# Allegro board LT6711GXE_U2_HDMI_to_DP_Draft2.brd
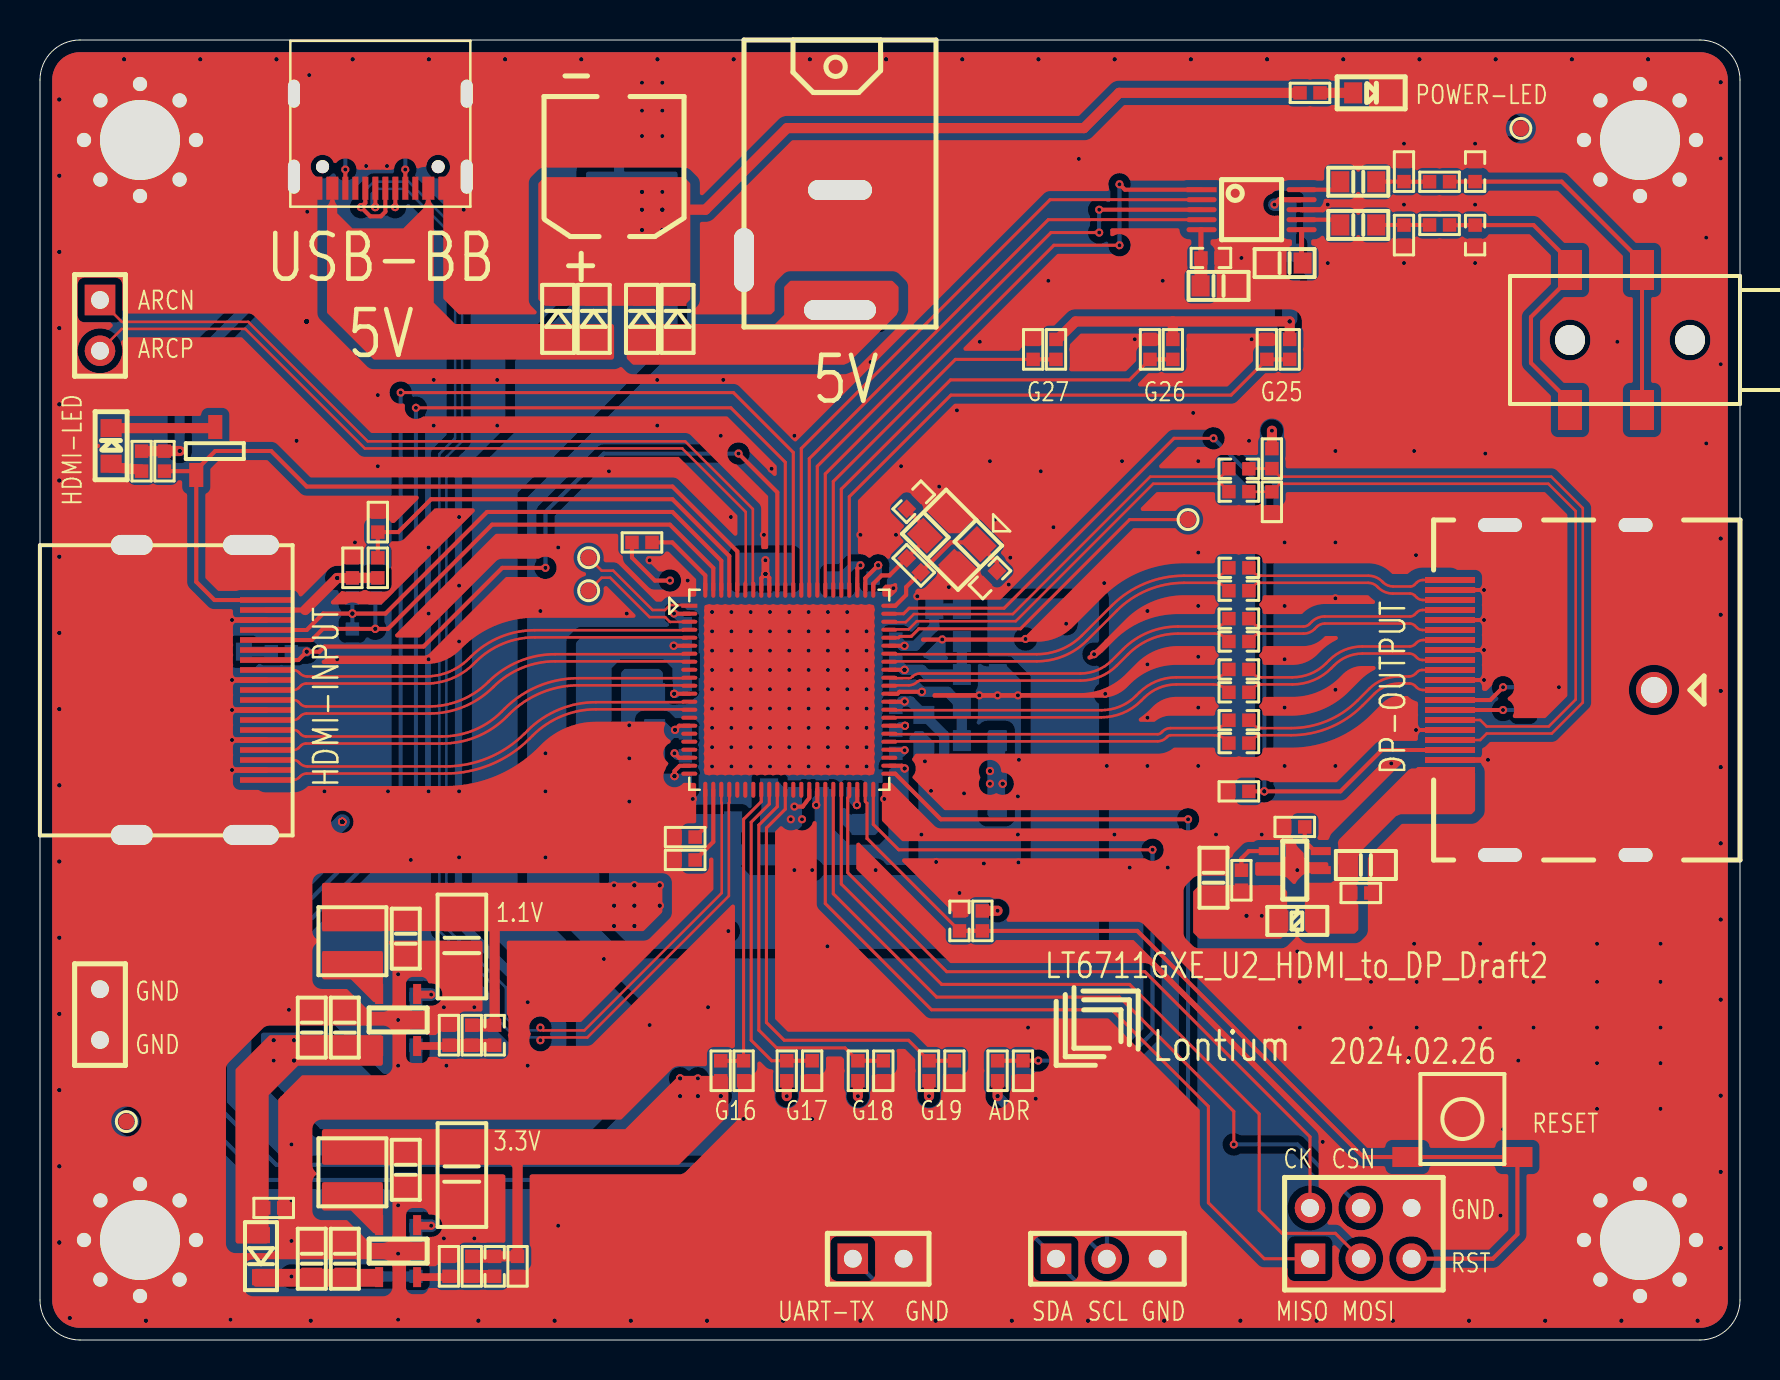
[diagram p0: board, top side]
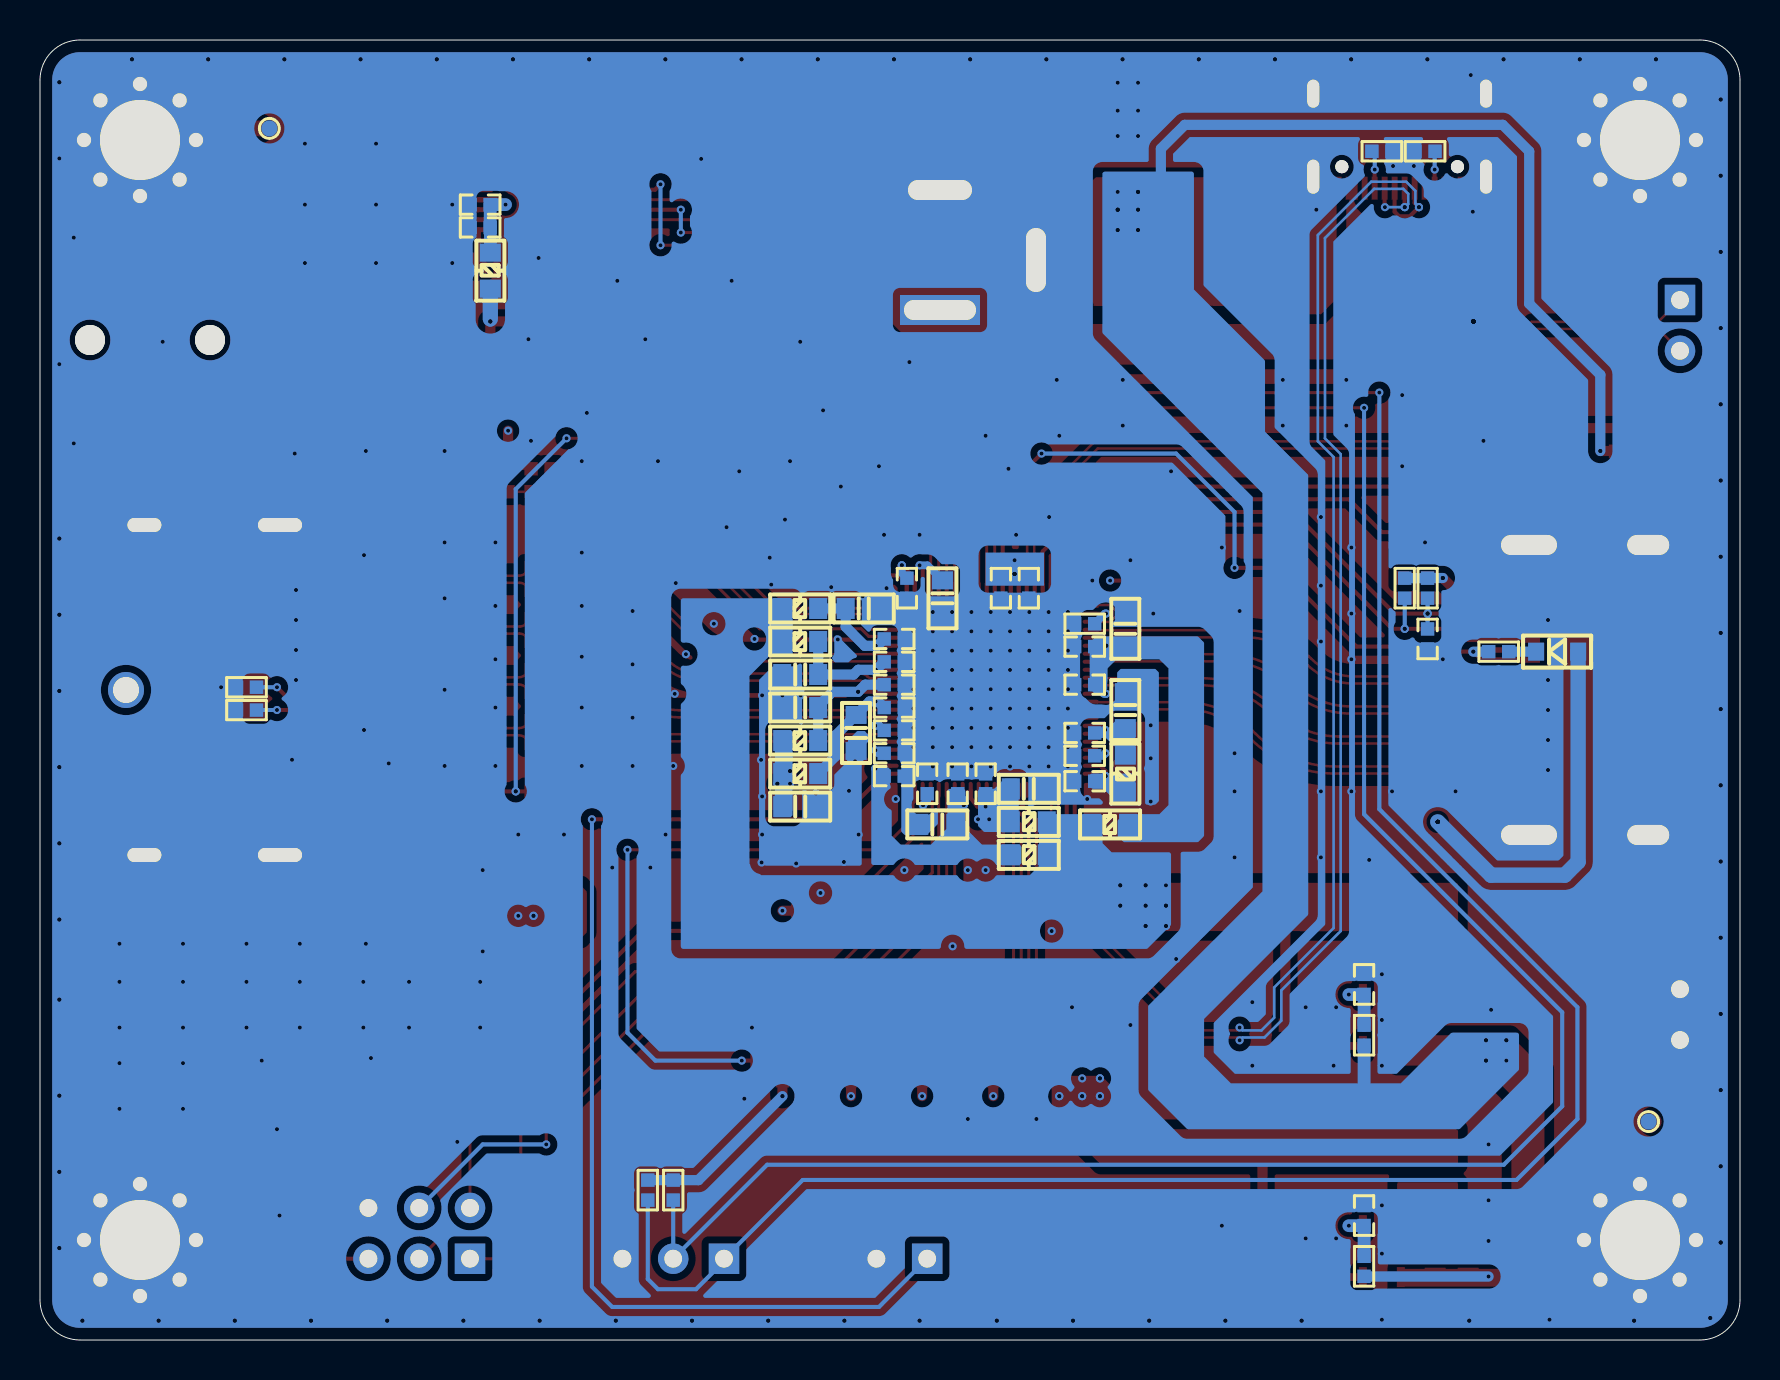
[diagram p1: board, bottom side, seen from below]

Outline 85 x 65 mm; copper layers: TOP, GND, POWER, BOTTOM. Coordinates in mm from the lower left corner of the outline.
Outline path: 0,63 0,2 arc(0.59,0.59) 2,0 83,0 arc(84.41,0.59) 85,2 85,63 arc(84.41,64.41) 83,65 2,65 arc(0.59,64.41) 0,63

## Design rules (mm)
constraint set DEFAULT: min track width 0.127
net group D1: nets HS_TSTN HS_TSTP
net group D2: nets ARCN ARCP
net group D3: nets TMDS_D0+ TMDS_D0-
net group D4: nets TMDS_D2+ TMDS_D2-
net group D5: nets TMDS_D1+ TMDS_D1-
net group D6: nets TMDS_CLK+ TMDS_CLK-
net group D7: nets N12122994 N12123010
net group D8: nets N12122980 N12122984
net group D9: nets N12122960 N12122976
net group D10: nets N12122880 N12122956
net group D11: nets DP_D3+ DP_D3-
net group D12: nets DP_D2+ DP_D2-
net group D13: nets DP_D1+ DP_D1-
net group D14: nets DP_D0+ DP_D0-
net group D15: nets DP_AUX+ DP_AUX-
net group D16: nets TX_AUXN TX_AUXP
net group D17: nets BB_DM BB_DP

## Placement (name value [footprint] x y rotation side)
C1  .10  [0603-C]  39.88 37.08 270 bottom
C2  .10  [0402-C]  59.94 38.61 0 top
C3  .10  [0402-C]  59.94 37.47 0 top
C4  .10  [0402-C]  59.94 36.07 0 top
C5  .10  [0402-C]  59.94 34.92 0 top
C6  .10  [0402-C]  59.94 33.53 0 top
C7  .10  [0402-C]  59.94 32.38 0 top
C8  .10  [0402-C]  59.94 30.99 0 top
C9  .10  [0402-C]  59.94 29.84 0 top
C10  .10  [0402-C]  59.94 42.42 0 top
C11  .10  [0402-C]  59.94 43.56 0 top
C12  .10  [0603-C]  30.73 35.56 90 bottom
C13  .10  [0402-C]  32.77 34.67 180 bottom
C14  .10  [0402-C]  32.77 32.77 180 bottom
C15  .10  [0603-C]  46.99 26.67 180 bottom
C16  .10  [0603-C]  43.81 36.58 180 bottom
C17  .10  [0402-C]  42.29 35.05 0 bottom
C18  .10  [0603-C]  46.99 33.27 0 bottom
C19  .10  [0402-C]  42.29 30.48 0 bottom
C20  .10  [0402-C]  47.5 38.1 225 top
C21  .10  [0402-C]  39.12 27.81 270 bottom
C22  .10  [0402-C]  42.29 28.19 0 bottom
C23  .10  [0402-C]  42.29 31.62 0 bottom
C24  .10  [0402-C]  42.29 29.34 0 bottom
C25  .10  [0603-C]  40.13 25.78 0 bottom
C26  .10  [0603-C]  35.56 27.56 180 bottom
C27  .10  [0402-C]  32.77 29.21 180 bottom
C28  .10  [0402-C]  37.72 27.81 270 bottom
C29  .10  [0402-C]  36.96 37.59 90 bottom
C30  .10  [0402-C]  35.56 37.59 90 bottom
C31  .10  [0402-C]  43.69 41.91 45 top
C32  .10  [0402-C]  22.73 15.24 90 top
C33  .10  [0603-C]  15.24 15.62 270 top
C34  .10  [0402-C]  18.8 17.78 90 bottom
C35  .10  [0603-C]  18.29 20.07 270 top
C36  .10  [1206-C]  21.08 19.68 270 top
C37  .10  [0402-C]  45.97 20.95 90 top
C38  .10  [0402-C]  42.29 33.91 0 bottom
C39  .10  [0402-C]  42.29 32.77 0 bottom
C40  .10  [0603-C]  46.99 31.62 0 bottom
C41  .10  [0402-C]  15.62 35.05 90 bottom
C42  .10  [1206-C]  21.08 8.26 270 top
C43  .10  [0402-C]  62.99 55.63 0 bottom
C44  .10  [0402-C]  62.99 56.77 0 bottom
C45  .10  [0402-C]  71.75 58.42 270 top
C46  .10  [0603-C]  65.91 57.91 0 top
C47  .10  [0603-C]  65.91 55.75 0 top
C48  .10  [0402-C]  18.8 6.22 90 bottom
C49  .10  [0603-C]  18.29 8.51 270 top
C50  .10  [0603-C]  58.93 52.7 0 top
C51  .10  [0402-C]  58.55 54.1 0 top
C52  .10  [0603-C]  62.23 53.85 180 top
C53  .10  [0402-C]  71.75 55.24 90 top
C54  .10  [0402-C]  22.73 3.68 90 top
C55  .10  [0603-C]  13.59 4.06 270 top
C56  .10  [0603-C]  30.73 31.5 90 bottom
C57  .10  [0402-C]  32.77 30.35 180 bottom
C58  .10  [0603-C]  44.2 30.35 270 bottom
C59  .10  [0402-C]  41.66 37.59 90 bottom
C60  .10  [0402-C]  32.77 27.94 180 bottom
C61  .10  [0402-C]  40.64 27.81 270 bottom
C62  .10  [0603-C]  13.59 15.62 270 top
C63  .10  [0603-C]  15.24 4.06 270 top
C64  .10  [0603-C]  58.67 23.11 90 top
C65  .10  [0603-C]  66.29 23.75 0 top
CE1  .10  [ECAP6_3_5_4MM]  28.7 58.67 180 top
CN1  -  [HDMI_TYPEA_FEMAL_SMD]  11.3 32.5 270 top
CN2  -  [DP_SMD_FEMALE]  80.7 32.5 90 top
D1  .10  [SOD-323]  9.14 34.42 0 bottom
D2  .10  [SOD-323]  11.05 4.19 270 top
D3  .10  [SOD-323]  31.88 51.05 90 top
D4  .10  [SOD-323]  30.1 51.05 90 top
D5  .10  [SOD-323]  25.91 51.05 90 top
D6  .10  [SOD-323]  27.69 51.05 90 top
FB1  .10  [0603-FB]  62.87 20.95 0 top
FB2  .10  [0603-FB]  31.5 25.78 180 bottom
FB3  .10  [0603-FB]  46.99 36.58 180 bottom
FB4  .10  [0603-FB]  46.99 34.92 180 bottom
FB5  .10  [0603-FB]  35.56 24.26 0 bottom
FB6  .10  [0603-FB]  35.56 25.91 0 bottom
FB7  .10  [0603-FB]  46.99 29.97 180 bottom
FB8  .10  [0603-FB]  30.73 28.32 90 bottom
FB9  .10  [0603-FB]  62.48 53.47 270 bottom
FB10  .10  [0603-FB]  46.99 28.32 180 bottom
H1  -  [HOLE4-7]  80 60 0 top
H2  -  [HOLE4-7]  5 5 0 top
H3  -  [HOLE4-7]  5 60 0 top
H4  -  [HOLE4-7]  80 5 0 top
J1  -  [DC005]  40 57.5 270 top
J2  -  [PHONEJACK_STEREO]  85 50 180 top
J3  -  [CON3X1X254MM]  50.8 4.06 0 top
J4  -  [KH_TYPEC_16_P]  17.02 58.17 180 top
J5  .10  [CON2X1X254MM]  40.64 4.06 0 top
J6  -  [CON3X2X254MM]  63.5 4.06 0 top
J7  .10  [CON2X1X254MM]  3 15 90 top
J8  .10  [CON2X1X254MM]  3 52 270 top
K1  -  [BUTTON_SMD]  71.12 11.05 90 top
L1  .10  [CD3015]  15.62 19.94 90 top
L2  .10  [CD3015]  15.62 8.38 90 top
LED1  .10  [0603-LED]  3.56 44.7 90 top
LED2  .10  [0603-LED]  66.55 62.36 0 top
MARK1  -  [TP1]  4.32 10.92 0 top
MARK2  -  [TP1]  74.04 60.58 0 top
MARK3  -  [TP1]  4.57 10.92 180 bottom
MARK4  -  [TP1]  73.53 60.58 180 bottom
P1  -  [TP1]  57.4 41.02 0 top
P2  -  [TP1]  27.43 39.12 0 top
P3  -  [TP1]  27.43 37.47 0 top
Q1  -  [SOT23-3]  8.76 44.45 90 top
R1  .10  [0402-R]  12.06 34.42 0 bottom
R2  .10  [0402-R]  32.77 35.81 0 bottom
R3  .10  [0402-R]  16.76 37.59 270 bottom
R4  .10  [0402-R]  15.62 37.59 270 bottom
R5  .10  [0402-R]  43.69 38.73 315 top
R6  .10  [0402-R]  5.08 43.94 90 top
R7  .10  [0402-R]  15.75 59.44 0 bottom
R8  .10  [0402-R]  15.62 38.61 90 top
R9  .10  [0402-R]  16.89 38.61 90 top
R10  .10  [0402-R]  59.94 27.43 180 top
R11  .10  [0402-R]  16.89 40.89 90 top
R12  .10  [0402-R]  44.45 13.46 90 top
R13  .10  [0402-R]  60.07 22.99 90 top
R14  .10  [0402-R]  61.59 44.07 270 top
R15  .10  [0402-R]  32.26 24 180 top
R16  .10  [0402-R]  32.26 25.15 180 top
R17  .10  [0402-R]  61.59 41.91 270 top
R18  .10  [0402-R]  63.5 62.36 180 top
R19  .10  [0402-R]  45.72 13.46 270 top
R20  .10  [0402-R]  74.68 32.64 0 bottom
R21  .10  [0402-R]  34.04 13.46 90 top
R22  .10  [0402-R]  37.34 13.46 90 top
R23  .10  [0402-R]  40.89 13.46 90 top
R24  .10  [0402-R]  18.8 15.24 90 bottom
R25  .10  [0402-R]  21.59 15.24 90 top
R26  .10  [0402-R]  20.45 15.24 270 top
R27  .10  [0402-R]  74.68 31.5 0 bottom
R28  .10  [0402-R]  38.61 13.46 270 top
R29  .10  [0402-R]  42.16 13.46 270 top
R30  .10  [0402-R]  47.12 20.95 270 top
R31  .10  [0402-R]  6.22 43.94 270 top
R32  .10  [0402-R]  35.18 13.46 270 top
R33  .10  [0402-R]  30.1 39.88 0 top
R34  .10  [0402-R]  54.61 7.49 270 bottom
R35  .10  [0402-R]  53.34 7.49 270 bottom
R36  .10  [0402-R]  69.98 57.91 0 top
R37  .10  [0402-R]  18.8 3.68 90 bottom
R38  .10  [0402-R]  20.45 3.68 270 top
R39  .10  [0402-R]  68.2 58.42 90 top
R40  .10  [0402-R]  21.59 3.68 90 top
R41  .10  [0402-R]  49.66 49.53 90 top
R42  .10  [0402-R]  50.8 49.53 270 top
R43  .10  [0402-R]  55.5 49.53 90 top
R44  .10  [0402-R]  56.64 49.53 270 top
R45  .10  [0402-R]  61.34 49.53 90 top
R46  .10  [0402-R]  62.48 49.53 270 top
R47  .10  [0402-R]  69.98 55.75 0 top
R48  .10  [0402-R]  68.2 55.24 270 top
R49  .10  [0402-R]  23.88 3.68 90 top
R50  .10  [0402-R]  47.88 13.46 90 top
R51  .10  [0402-R]  49.15 13.46 270 top
R52  .10  [0402-R]  11.68 6.6 180 top
R53  .10  [0402-R]  62.74 25.65 0 top
R54  .10  [0402-R]  66.04 22.35 0 top
R55  .10  [0402-R]  17.91 59.44 180 bottom
U1  -  [QFN88-LT6711GXE]  37.47 32.51 0 top
U2  -  [SOT23-5]  17.91 16 180 top
U3  -  [SOT23-5]  17.91 4.45 180 top
U4  -  [SOT23-5]  62.74 23.5 90 top
U5  -  [TSSOP-10-3MM]  60.58 56.52 270 top
Y1  -  [CRY_3225]  45.59 40.01 315 top

## Library data of the parts
C1 C12 C15 C16 C18 C25 C26 C33 C35 C40 C46 C47 C49 C50 C52 C55 C56 C58 C62-C65 = 0603-C
C2-C11 C13 C14 C17 C19-C24 C27-C32 C34 C37-C39 C41 C43-C45 C48 C51 C53 C54 C57 C59-C61 = 0402-C
C36 C42 = 1206-C
CE1 = ECAP6_3_5_4MM
CN1 = HDMI_TYPEA_FEMAL_SMD
CN2 = DP_SMD_FEMALE
D1-D6 = SOD-323
FB1-FB10 = 0603-FB
H1-H4 = HOLE4-7
J1 = DC005
J2 = PHONEJACK_STEREO
J3 = CON3X1X254MM
J4 = KH_TYPEC_16_P
J5 J7 J8 = CON2X1X254MM
J6 = CON3X2X254MM
K1 = BUTTON_SMD
L1 L2 = CD3015
LED1 LED2 = 0603-LED
MARK1-MARK4 P1-P3 = TP1
Q1 = SOT23-3
R1-R55 = 0402-R
U1 = QFN88-LT6711GXE
U2-U4 = SOT23-5
U5 = TSSOP-10-3MM
Y1 = CRY_3225

## Footprints (pads in the part's own frame, mm; a bottom-side part is the same pattern mirrored in y, then rotated)
0402-C
  rect 0.67x0.67 smd: 1(-0.5,0) 2(0.5,0)
0402-R
  rect 0.67x0.67 smd: 1(-0.5,0) 2(0.5,0)
0603-C
  rect 0.9x1.05 smd: 1(-0.9,0) 2(0.9,0)
0603-FB
  rect 0.9x1.05 smd: 1(-0.9,0) 2(0.9,0)
0603-LED
  rect 0.9x1.05 smd: A(-0.889,0) C(0.889,0)
1206-C
  rect 1.5x1.8 smd: 1(-1.5,0) 2(1.5,0)
BUTTON_SMD
  rect 1x1.5 smd: 1(-1.9,2.75) 2(-1.9,-2.75) 3(1.9,-2.75) 4(1.9,2.75)
CD3015
  rect 1x3 smd: 1(-1,0) 2(1,0)
CON2X1X254MM
  rect 1.524x1.524 hole 0.889: 1(0,0)
  round 1.524 hole 0.889: 2(2.54,0)
CON3X1X254MM
  rect 1.524x1.524 hole 0.889: 1(0,0)
  round 1.524 hole 0.889: 2(2.54,0) 3(5.08,0)
CON3X2X254MM
  rect 1.524x1.524 hole 0.889: 1(0,0)
  round 1.524 hole 0.889: 2(0,2.54) 3(2.54,0) 4(2.54,2.54) 5(5.08,0) 6(5.08,2.54)
CRY_3225
  rect 1.4x1.15 smd: 1(1.1,0.8) 2(-1.1,0.8) 3(-1.1,-0.8) 4(1.1,-0.8)
DC005
  rect 3.8x1.5 hole 3.2x1: 1(3.5,-4.8)
  rect 1.5x4 hole 1x3.6: 2(6,0)
  rect 1.5x3.8 hole 1x3.2: 3(0,0)
DP_SMD_FEMALE
  rect 0.3x2.5 smd: 1(5.5,10.2) 2(5,10.2) 3(4.5,10.2) 4(4,10.2) 5(3.5,10.2) 6(3,10.2) 7(2.5,10.2) 8(2,10.2) 9(1.5,10.2) 10(1,10.2) 11(0.5,10.2) 12(0,10.2) 13(-0.5,10.2) 14(-1,10.2) 15(-1.5,10.2) 16(-2,10.2) 17(-2.5,10.2) 18(-3,10.2) 19(-3.5,10.2) 20(-4,10.2)
  oval 1.2x3 hole 0.7x2.2: 21(-8.25,7.7) 23(8.25,7.7)
  oval 1.2x2.5 hole 0.7x1.7: 22(-8.25,0.92) 24(8.25,0.92)
  round 1.8 hole 1.3: 25(0,0)
ECAP6_3_5_4MM
  rect 1x3.5 smd: 1(0.01,2.55) 2(0.01,-2.75)
HDMI_TYPEA_FEMAL_SMD
  rect 0.28x2.6 smd: 1(4.5,0) 2(4,0) 3(3.5,0) 4(3,0) 5(2.5,0) 6(2,0) 7(1.5,0) 8(1,0) 9(0.5,0) 10(0,0) 11(-0.5,0) 12(-1,0) 13(-1.5,0) 14(-2,0) 15(-2.5,0) 16(-3,0) 17(-3.5,0) 18(-4,0) 19(-4.5,0)
  oval 1.5x3.3 hole 1x2.8: 20(-7.252,-0.75) 21(7.248,-0.75)
  oval 1.5x2.7 hole 1x2.1: 22(-7.252,-6.71) 23(7.248,-6.71)
HOLE4-7
  round 7 hole 4: 1(0,0)
  round 1.016 hole 0.711: 2(0,2.8) 3(-2.8,0) 4(2.8,0) 5(-1.98,-1.98) 6(1.98,-1.98) 7(1.98,1.98) 8(0,-2.8) 9(-1.98,1.98)
KH_TYPEC_16_P
  rect 0.6x1.15 smd: A1B12(-3.2,0.575) A4B9(-2.4,0.575) B1A12(3.2,0.575) B4A9(2.4,0.575)
  rect 0.3x1.15 smd: A5(-1.25,0.575) A6(-0.25,0.575) A7(0.25,0.575) A8(-1.75,0.575) B5(1.75,0.575) B6(0.75,0.575) B7(-0.75,0.575) B8(1.25,0.575)
  oval 1x2.1 hole 0.6x1.7: G1(-4.32,0) G2(4.32,0)
  oval 1x1.8 hole 0.6x1.4: G3(-4.32,-4.15) G4(4.32,-4.15)
  round 0.65 hole 0.65: G5(-2.89,-0.5) G6(2.89,-0.5)
PHONEJACK_STEREO
  rect 1.2x2 smd: 1(8.5,-3.5) 2(8.5,3.5) 3(4.9,-3.5) 4(4.9,3.5) 5(1.7,-3.5) 6(1.7,3.5)
  round 1.5 hole 1.5: 7(2.5,0) 8(8.5,0)
QFN88-LT6711GXE
  rect 0.8x0.2 smd: 1(-5,4.2)
  oval 0.8x0.2 smd: 2(-5,3.8) 3(-5,3.4) 4(-5,3) 5(-5,2.6) 6(-5,2.2) 7(-5,1.8) 8(-5,1.4) 9(-5,1) 10(-5,0.6) 11(-5,0.2) 12(-5,-0.2) 13(-5,-0.6) 14(-5,-1) 15(-5,-1.4) 16(-5,-1.8) 17(-5,-2.2) 18(-5,-2.6) 19(-5,-3) 20(-5,-3.4) 21(-5,-3.8) 22(-5,-4.2) 45(5,-4.2) 46(5,-3.8) 47(5,-3.4) 48(5,-3) 49(5,-2.6) 50(5,-2.2) 51(5,-1.8) 52(5,-1.4) 53(5,-1) 54(5,-0.6) 55(5,-0.2) 56(5,0.2) 57(5,0.6) 58(5,1) 59(5,1.4) 60(5,1.8) 61(5,2.2) 62(5,2.6) 63(5,3) 64(5,3.4) 65(5,3.8) 66(5,4.2)
  oval 0.2x0.8 smd: 23(-4.2,-5) 24(-3.8,-5) 25(-3.4,-5) 26(-3,-5) 27(-2.6,-5) 28(-2.2,-5) 29(-1.8,-5) 30(-1.4,-5) 31(-1,-5) 32(-0.6,-5) 33(-0.2,-5) 34(0.2,-5) 35(0.6,-5) 36(1,-5) 37(1.4,-5) 38(1.8,-5) 39(2.2,-5) 40(2.6,-5) 41(3,-5) 42(3.4,-5) 43(3.8,-5) 44(4.2,-5) 67(4.2,5) 68(3.8,5) 69(3.4,5) 70(3,5) 71(2.6,5) 72(2.2,5) 73(1.8,5) 74(1.4,5) 75(1,5) 76(0.6,5) 77(0.2,5) 78(-0.2,5) 79(-0.6,5) 80(-1,5) 81(-1.4,5) 82(-1.8,5) 83(-2.2,5) 84(-2.6,5) 85(-3,5) 86(-3.4,5) 87(-3.8,5) 88(-4.2,5)
  rect 8.2x8.2 smd: 89(0,0)
SOD-323
  rect 0.8x0.9 smd: 1(-1.05,0) 2(1.05,0)
SOT23-3
  rect 1.2x0.7 smd: 1(-1.2,0.95) 2(-1.2,-0.95) 3(1.2,0)
SOT23-5
  rect 0.4x1 smd: 1(-0.95,-1.3) 2(0,-1.3) 3(0.95,-1.3) 4(0.95,1.3) 5(-0.95,1.3)
TP1
  round 0.8 smd: 1(0,0)
TSSOP-10-3MM
  rect 0.25x1.5 smd: 1(-1,-2.5)
  oval 0.25x1.5 smd: 2(-0.5,-2.5) 3(0,-2.5) 4(0.5,-2.5) 5(1,-2.5) 6(1,2.5) 7(0.5,2.5) 8(0,2.5) 9(-0.5,2.5) 10(-1,2.5)

## Nets
1V1: C32.2 C35.1 C36.1 FB2.1 FB3.1 FB4.1 FB5.1 FB6.1 L1.2 R25.2
5V_IN1: D3.1 D4.1 J1.2
5V_IN2: D5.1 D6.1 J4.A4B9 J4.B4A9
5V_SYS: C33.2 C62.2 CE1.1 D2.1 D3.2 D4.2 D5.2 D6.2 R6.2 R18.2 R24.1 R31.1 R52.2 U2.4
GND: C1.2 C12.2 C13.1 C14.1 C15.2 C16.2 C17.1 C18.2 C19.1 C20.2 C21.1 C22.1 C23.1 C24.1 C25.2 C26.2 C27.1 C28.1 C29.1 C30.1 C31.2 C33.1 C34.2 C35.2 C36.2 C37.2 C38.1 C39.1 C40.2 C41.1 C42.2 C43.2 C44.2 C45.1 C48.2 C49.2 C50.2 C51.2 C52.2 C53.1 C55.1 C56.2 C57.1 C58.2 C59.1 C60.1 C61.1 C62.1 C63.1 C64.2 C65.2 CE1.2 CN1.2 CN1.5 CN1.8 CN1.11 CN1.17 CN1.20 CN1.21 CN1.22 CN1.23 CN2.2 CN2.5 CN2.8 CN2.11 CN2.16 CN2.19 CN2.21 CN2.22 CN2.23 CN2.24 H1.1 H1.2 H1.3 H1.4 H1.5 H1.6 H1.7 H1.8 H1.9 H2.1 H2.2 H2.3 H2.4 H2.5 H2.6 H2.7 H2.8 H2.9 H3.1 H3.2 H3.3 H3.4 H3.5 H3.6 H3.7 H3.8 H3.9 H4.1 H4.2 H4.3 H4.4 H4.5 H4.6 H4.7 H4.8 H4.9 J1.1 J1.3 J2.5 J2.6 J3.3 J4.A1B12 J4.B1A12 J4.G1 J4.G2 J4.G3 J4.G4 J5.2 J6.6 J7.1 J7.2 K1.3 K1.4 LED2.C Q1.2 R2.2 R7.2 R8.2 R10.2 R11.2 R15.2 R16.2 R17.2 R19.2 R20.2 R26.1 R27.2 R28.2 R29.2 R32.2 R38.1 R39.2 R41.2 R43.2 R45.2 R48.2 R49.1 R51.2 R52.1 R53.1 R54.2 R55.2 U1.89 U2.2 U3.2 U4.2 U5.8 Y1.2 Y1.4
VCC11: C21.2 C22.2 C25.1 FB5.2 U1.37 U1.46
VCC11_GPLL: C16.1 C17.2 FB3.2 U1.61
VCC11_RX: C12.1 C13.2 C14.2 FB2.2 U1.6 U1.12
VCC11_TX: C18.1 C19.2 C38.2 FB4.2 U1.51 U1.58
VCC33_RX: C56.1 C57.2 FB8.2 U1.16
VCC33_TX: C23.2 C58.1 FB10.2 U1.54
VCCIO33: C15.1 C42.1 C49.1 C54.2 C59.2 C60.2 C61.2 C64.1 D1.1 FB1.1 FB7.1 FB8.1 FB9.2 FB10.1 L2.2 R12.1 R13.1 R14.1 R21.1 R22.1 R23.1 R30.1 R33.1 R34.1 R35.1 R40.2 R42.1 R44.1 R46.1 R49.2 R50.1 U1.21 U1.42 U1.68 U4.5
VDD11: C24.2 C26.1 C27.2 C28.2 C29.2 C30.2 FB6.2 U1.20 U1.36 U1.48 U1.80 U1.81
ARCN: J8.1 U1.82
ARCP: J8.2 U1.83
AUDIO_L_O: C53.2 J2.1 J2.2 R47.2
AUDIO_R_O: C45.2 J2.3 J2.4 R36.2
BB_CC1: J4.A5 R55.1
BB_CC2: J4.B5 R7.1
BB_DM: J4.A7 J4.B7 U1.26
BB_DP: J4.A6 J4.B6 U1.25
CSCL: J3.2 R35.2 U1.78
CSDA: J3.1 R34.2 U1.77
D1_CC1: R16.1 U1.23
D1_CC2: R15.1 U1.24
DDC_SCL: CN1.15 R3.2 U1.87
DDC_SDA: C41.2 CN1.16 R4.2 U1.86
DP_AUX+: C10.2 CN2.15 R17.1
DP_AUX-: C11.2 CN2.17 R14.2
DP_D0+: C2.1 U1.60
DP_D0-: C3.1 U1.59
DP_D1+: C4.1 U1.57
DP_D1-: C5.1 U1.56
DP_D2+: C6.1 U1.53
DP_D2-: C7.1 U1.52
DP_D3+: C8.1 U1.50
DP_D3-: C9.1 U1.49
DP_PWR: C65.1 CN2.20 FB1.2 R54.1 U4.1
GPIO3: R33.2 U1.88
GPIO16: R21.2 R32.1 U1.30
GPIO17: R22.2 R28.1 U1.31
GPIO18: R23.2 R29.1 U1.32
GPIO19: R12.2 R19.1 U1.33
GPIO23: P1.1 U1.62
HDMI_5V_DET: R9.2 R11.1 U1.85
HS_TSTN: P3.1 U1.3
HS_TSTP: P2.1 U1.1
I2C_ADR: R50.2 R51.1 U1.44
MCLK_B/GPIO30: U1.75 U5.4
REXT: R2.1 U1.2
RST_N: C37.1 J6.5 K1.1 K1.2 R30.2 U1.43
RX_5V: CN1.18 R3.1 R4.1 R8.1 R9.1
RX_CEC: CN1.13 R1.2 U1.79
RX_HPD: CN1.19 Q1.1 R31.2 U1.84
SCLK_B/GPIO31: U1.76 U5.2
SD0_B/GPIO28: U1.73 U5.1
SD1_B/GPIO27: R41.1 R42.2 U1.72
SD2_B/GPIO26: R43.1 R44.2 U1.71
SD3_B/GPIO25: R45.1 R46.2 U1.70
SPI_CK: J6.2 U1.41
SPI_CSN: J6.4 U1.39
SPI_MISO: J6.1 U1.38
SPI_MOSI: J6.3 U1.40
TMDS_CLK+: CN1.10 U1.5
TMDS_CLK-: CN1.12 U1.4
TMDS_D0+: CN1.7 U1.8
TMDS_D0-: CN1.9 U1.7
TMDS_D1+: CN1.4 U1.11
TMDS_D1-: CN1.6 U1.10
TMDS_D2+: CN1.1 U1.14
TMDS_D2-: CN1.3 U1.13
TX_AUXN: C11.1 U1.64
TX_AUXP: C10.1 U1.63
TX_HPD: CN2.18 R10.1 U1.65
UART_TX: J5.1 U1.45
VCAP: C1.1 U1.69
VTERM: C39.2 C40.1 FB7.2 U1.55
WS_B/GPIO29: U1.74 U5.3
XTAL_IN: C31.1 R5.1 U1.67 Y1.3
XTAL_OUT: C20.1 R5.2 U1.66 Y1.1
N3817633: LED2.A R18.1
N10745133: C43.1 C44.1 FB9.1 U5.9
N10745259: C50.1 C51.1 U5.5
N10745279: C52.1 U5.6
N10745359: C46.1 U5.10
N10745363: C47.1 U5.7
N10745399: C47.2 R47.1 R48.1
N10745459: C46.2 R36.1 R39.1
N12122880: C3.2 CN2.3
N12122956: C2.2 CN2.1
N12122960: C5.2 CN2.6
N12122976: C4.2 CN2.4
N12122980: C6.2 CN2.7
N12122984: C7.2 CN2.9
N12122994: C9.2 CN2.12
N12123010: C8.2 CN2.10
N12349730: LED1.A R6.1
N12716242: CN2.13 R20.1
N12716249: CN2.14 R27.1
N12842552: D1.2 R1.1
N13408424: C55.2 C63.2 D2.2 R37.1 U3.4
N13408556: C48.1 R37.2 U3.1
N13408742: L2.1 U3.3
N13408806: C54.1 R38.2 R40.1 U3.5
N13416535: C34.1 R24.2 U2.1
N13416757: L1.1 U2.3
N13416805: C32.1 R25.1 R26.2 U2.5
N13450472: R13.2 U4.4
N13450480: R53.2 U4.3
N121165261: LED1.C Q1.3

Pads without a net: CN1 14; CN2 25; J2 7 8; J4 A8 B8 G5 G6; MARK1 1; MARK2 1; MARK3 1; MARK4 1; U1 9 15 17 18 19 22 27 28 29 34 35 47

## Via types
v1: diameter 0.406, hole 0.203, TOP to BOTTOM, 1031 vias

## Routing (per net, layer and track width the routed paths; a pad name or vN(x,y) marks a point on that pad's centre or on a via; arc(x,y) is an arc through that point)
1V1: length 8
  TOP w0.508: C32.2 22.73,20.72 22.27,21.19 C36.1
  TOP w0.635: C32.2 R25.2
  vias: v1(28.7,22.73) v1(28.7,21.72) v1(28.7,21.72) v1(28.7,20.7) v1(28.7,20.7) v1(29.72,22.73) v1(29.72,22.73) v1(29.72,21.72) v1(29.72,21.72) v1(29.72,20.7) v1(29.72,20.7) v1(30.99,22.73) v1(30.99,22.73) v1(30.99,21.72) v1(30.99,21.72)
5V_SYS: length 77
  TOP w0.508: R18.2 53.96,62.36 52.2,60.6 37.35,60.6 33.27,56.52 v1(31.11,56.52) ; R6.2 R31.1 6.22,44.45 v1(6.99,44.45)
  BOTTOM w0.508: v1(6.99,44.45) 6.99,48.26 10.54,51.82 10.54,59.44 11.86,60.76 27.76,60.76 28.96,59.56 28.96,57.91 29.46,57.4 v1(30.1,57.4)
  BOTTOM w0.635: 18.8,12.85 R24.1
  vias: v1(11.68,14.99) v1(11.68,14.99) v1(11.68,13.97) v1(12.7,14.99) v1(12.7,14.99) v1(12.7,13.97) v1(12.7,13.97) v1(30.1,56.52) v1(30.1,56.52) v1(30.1,55.5) v1(30.1,55.5) v1(31.11,57.4) v1(31.11,55.5) v1(31.11,55.5)
GND: length 21.3
  TOP w0.203: v1(37.47,33.5) v1(37.47,32.54) U1.89 ; CN2.2 v1(72.2,37.5) ; CN2.16 v1(68.8,30.5) ; CN2.11 v1(72.2,33) ; CN2.5 v1(72.2,36) ; CN2.8 v1(72.2,34.5)
  TOP w0.254: U5.8 64.14,56.52 v1(64.39,56.77)
  TOP w0.279: v1(72.4,29.01) 72.39,29 CN2.19
  TOP w0.28: CN1.8 v1(9.6,31.5) ; CN1.11 v1(9.6,33) ; CN1.2 v1(9.6,28.5) ; CN1.17 v1(9.6,36) ; CN1.5 v1(9.6,30)
  vias: v1(0.97,62.02) v1(0.97,62.02) v1(0.97,58.21) v1(0.97,58.21) v1(0.97,54.4) v1(0.97,54.4) v1(0.97,50.59) v1(0.97,50.59) v1(0.97,46.78) v1(0.97,46.78) v1(0.97,42.97) v1(0.97,42.97) v1(0.97,39.16) v1(0.97,39.16) v1(0.97,35.35) v1(0.97,35.35) v1(0.97,31.54) v1(0.97,31.54) v1(0.97,27.73) v1(0.97,27.73) v1(0.97,23.92) v1(0.97,23.92) v1(0.97,20.11) v1(0.97,20.11) v1(0.97,16.3) v1(0.97,16.3) v1(0.97,12.49) v1(0.97,12.49) v1(0.97,8.68) v1(0.97,8.68) v1(0.97,4.87) v1(0.97,4.87) v1(0.97,4.87) v1(1.49,1.1) v1(1.49,1.1) v1(4.2,64.03) v1(4.2,64.03) v1(5.3,0.97) v1(5.3,0.97) v1(8.01,64.03) v1(8.01,64.03) v1(9.53,1.02) v1(11.82,64.03) v1(11.82,64.03) v1(12.45,16.51) v1(12.57,9.78) v1(12.57,6.99) v1(12.57,4.95) v1(12.83,44.96) v1(13.34,50.93) v1(13.34,50.93) v1(13.34,50.93) v1(13.34,50.93) v1(13.34,50.93) v1(13.34,50.93) v1(13.34,50.93) v1(13.34,50.93) v1(13.34,50.93) v1(13.34,50.93) v1(13.34,50.93) v1(13.34,50.93) v1(13.34,50.93) v1(13.34,50.93) v1(13.34,50.93) v1(13.34,50.93) v1(13.34,50.93) v1(13.34,50.93) v1(13.34,50.93) v1(13.34,50.93) v1(13.34,50.93) v1(13.34,50.93) v1(13.34,50.93) v1(13.34,50.93) v1(13.34,50.93) v1(13.34,50.93) v1(13.34,50.93) v1(13.34,50.93) v1(13.34,50.93) v1(13.34,50.93) v1(13.34,50.93) v1(13.34,50.93) v1(13.34,50.93) v1(13.34,50.93) v1(13.34,50.93) v1(13.34,50.93) v1(13.34,50.93) v1(13.34,50.93) v1(13.34,50.93) v1(13.34,50.93) v1(13.34,50.93) v1(13.34,50.93) v1(13.34,50.93) v1(13.34,50.93) v1(13.34,50.93) v1(13.34,50.93) v1(13.34,50.93) v1(13.34,50.93) v1(13.34,50.93) v1(13.34,50.93) v1(13.34,50.93) v1(13.34,50.93) v1(13.34,50.93) v1(13.34,50.93) v1(13.34,50.93) v1(13.34,50.93) v1(13.34,50.93) v1(13.34,50.93) v1(13.34,50.93) v1(13.34,50.93) v1(13.34,50.93) v1(13.34,50.93) v1(13.34,50.93) v1(13.34,50.93) v1(13.34,50.93) v1(13.34,50.93) v1(13.34,50.93) v1(13.34,50.93) v1(13.34,50.93) v1(13.34,50.93) v1(13.34,50.93) v1(13.34,50.93) v1(13.34,50.93) v1(13.34,50.93) v1(13.34,50.93) v1(13.34,50.93) v1(13.34,50.93) v1(13.34,50.93) v1(13.34,50.93) v1(13.34,50.93) v1(13.34,50.93) v1(13.34,50.93) v1(13.34,50.93) v1(13.34,50.93) v1(13.34,50.93) v1(13.34,50.93) v1(13.34,50.93) v1(13.34,50.93) v1(13.34,50.93) v1(13.34,50.93) v1(13.34,50.93) v1(13.34,50.93) v1(13.34,50.93) v1(13.34,50.93) v1(13.34,50.93) v1(13.34,50.93) v1(13.34,50.93) v1(13.34,50.93) v1(13.34,50.93) v1(13.34,50.93) v1(13.34,50.93) v1(13.34,50.93) v1(13.34,50.93) v1(13.34,50.93) v1(13.34,50.93) v1(13.34,50.93) v1(13.34,50.93) v1(13.34,50.93) v1(13.34,50.93) v1(13.34,50.93) v1(13.34,50.93) v1(13.34,50.93) v1(13.34,50.93) v1(13.34,50.93) v1(13.34,50.93) v1(13.34,50.93) v1(13.34,50.93) v1(13.34,50.93) v1(13.34,50.93) v1(13.34,50.93) v1(13.34,50.93) v1(13.34,50.93) v1(13.34,50.93) v1(13.34,50.93) v1(13.34,50.93) v1(13.34,50.93) v1(13.34,50.93) v1(13.34,50.93) v1(13.34,50.93) v1(13.34,50.93) v1(13.34,50.93) v1(13.34,50.93) v1(13.34,50.93) v1(13.34,50.93) v1(13.34,50.93) v1(13.34,50.93) v1(13.34,50.93) v1(13.34,50.93) v1(13.34,50.93) v1(13.34,50.93) v1(13.34,50.93) v1(13.34,50.93) v1(13.34,50.93) v1(13.34,50.93) v1(13.34,50.93) v1(13.34,50.93) v1(13.34,50.93) v1(13.34,50.93) v1(13.34,50.93) v1(13.34,50.93) v1(13.34,50.93) v1(13.34,50.93) v1(13.34,50.93) v1(13.34,50.93) v1(13.34,50.93) v1(13.34,50.93) v1(13.34,50.93) v1(13.34,50.93) v1(13.34,50.93) v1(13.34,50.93) v1(13.34,50.93) v1(13.34,50.93) v1(13.34,50.93) v1(13.34,50.93) v1(13.34,50.93) v1(13.34,50.93) v1(13.34,50.93) v1(13.34,50.93) v1(13.34,50.93) v1(13.34,50.93) v1(13.34,50.93) v1(13.34,50.93) v1(13.34,50.93) v1(13.34,50.93) v1(13.34,50.93) v1(13.34,50.93) v1(13.34,50.93) v1(13.34,50.93) v1(13.34,50.93) v1(13.34,50.93) v1(13.34,50.93) v1(13.34,50.93) v1(13.34,50.93) v1(13.34,50.93) v1(13.34,50.93) v1(13.34,50.93) v1(13.34,50.93) v1(13.34,50.93) v1(13.34,50.93) v1(13.34,50.93) v1(13.34,50.93) v1(13.34,50.93) v1(13.34,50.93) v1(13.34,50.93) v1(13.34,50.93) v1(13.34,50.93) v1(13.34,50.93) v1(13.34,50.93) v1(13.34,50.93) v1(13.34,50.93) v1(13.34,50.93) v1(13.34,50.93) v1(13.34,50.93) v1(13.34,50.93) v1(13.34,50.93) v1(13.34,50.93) v1(13.34,50.93) v1(13.34,50.93) v1(13.34,50.93) v1(13.34,50.93) v1(13.34,50.93) v1(13.34,50.93) v1(13.34,50.93) v1(13.34,50.93) v1(13.34,50.93) v1(13.34,50.93) v1(13.34,50.93) v1(13.34,50.93) v1(13.34,50.93) v1(13.34,50.93) v1(13.34,50.93) v1(13.34,50.93) v1(13.34,50.93) v1(13.34,50.93) v1(13.34,50.93) v1(13.34,50.93) v1(13.34,50.93) v1(13.34,50.93) v1(13.34,50.93) v1(13.34,50.93) v1(13.34,50.93) v1(13.34,50.93) v1(13.34,50.93) v1(13.34,50.93) v1(13.34,50.93) v1(13.34,50.93) v1(13.34,50.93) v1(13.34,50.93) v1(13.34,50.93) v1(13.34,50.93) v1(13.34,50.93) v1(13.34,50.93) v1(13.34,50.93) v1(13.34,50.93) v1(13.34,50.93) v1(13.34,50.93) v1(13.34,50.93) v1(13.34,50.93) v1(13.34,50.93) v1(13.34,50.93) v1(13.34,50.93) v1(13.34,50.93) v1(13.34,50.93) v1(13.34,50.93) v1(13.34,50.93) v1(13.34,50.93) v1(13.34,50.93) v1(13.34,50.93) v1(13.34,50.93) v1(13.34,50.93) v1(13.34,50.93) v1(13.34,50.93) v1(13.34,50.93) v1(13.34,50.93) v1(13.34,50.93) v1(13.34,50.93) v1(13.34,50.93) v1(13.34,50.93) v1(13.34,50.93) v1(13.34,50.93) v1(13.34,50.93) v1(13.34,50.93) v1(13.34,50.93) v1(13.34,50.93) v1(13.34,50.93) v1(13.34,50.93) v1(13.34,50.93) v1(13.34,50.93) v1(13.34,50.93) v1(13.34,50.93) v1(13.34,50.93) v1(13.34,50.93) v1(13.34,50.93) v1(13.34,50.93) v1(13.34,50.93) v1(13.34,50.93) v1(13.34,50.93) v1(13.34,50.93) v1(13.34,50.93) v1(13.34,50.93) v1(13.34,50.93) v1(13.34,50.93) v1(13.34,50.93) v1(13.34,50.93) v1(13.34,50.93) v1(13.34,50.93) v1(13.34,50.93) v1(13.34,50.93) v1(13.34,50.93) v1(13.34,50.93) v1(13.34,50.93) v1(13.34,50.93) v1(13.34,50.93) v1(13.34,50.93) v1(13.34,50.93) v1(13.34,50.93) v1(13.34,50.93) v1(13.34,50.93) v1(13.34,50.93) v1(13.34,50.93) v1(13.34,50.93) v1(13.34,50.93) v1(13.34,50.93) v1(13.34,50.93) v1(13.34,50.93) v1(13.34,50.93) v1(13.34,50.93) v1(13.34,50.93) v1(13.34,50.93) v1(13.34,50.93) v1(13.34,50.93) v1(13.34,50.93) v1(13.34,50.93) v1(13.34,50.93) v1(13.34,50.93) v1(13.34,50.93) v1(13.34,50.93) v1(13.34,50.93) v1(13.34,50.93) v1(13.34,50.93) v1(13.34,50.93) v1(13.34,50.93) v1(13.34,50.93) v1(13.34,50.93) v1(13.34,50.93) v1(13.34,50.93) v1(13.34,50.93) v1(13.34,50.93) v1(13.34,50.93) v1(13.34,50.93) v1(13.34,50.93) v1(13.34,50.93) v1(13.34,50.93) v1(13.34,50.93) v1(13.34,50.93) v1(13.34,50.93) v1(13.34,50.93) v1(13.34,50.93) v1(13.34,50.93) v1(13.34,50.93) v1(13.34,50.93) v1(13.34,50.93) v1(13.34,50.93) v1(13.34,50.93) v1(13.34,50.93) v1(13.34,50.93) v1(13.34,50.93) v1(13.34,50.93) v1(13.34,50.93) v1(13.34,50.93) v1(13.34,50.93) v1(13.34,50.93) v1(13.34,50.93) v1(13.34,50.93) v1(13.34,50.93) v1(13.34,50.93) v1(13.34,50.93) v1(13.34,50.93) v1(13.34,50.93) v1(13.34,50.93) v1(13.34,50.93) v1(13.34,50.93) v1(13.34,50.93) v1(13.34,50.93) v1(13.34,50.93) v1(13.34,50.93) v1(13.34,50.93) v1(13.34,50.93) v1(13.34,50.93) v1(13.34,50.93) v1(13.34,50.93) v1(13.34,50.93) v1(13.34,50.93) v1(13.34,50.93) v1(13.34,50.93) v1(13.34,50.93) v1(13.34,50.93) v1(13.34,50.93) v1(13.34,50.93) v1(13.34,50.93) v1(13.34,50.93) v1(13.34,50.93) v1(13.34,50.93) v1(13.34,50.93) v1(13.34,50.93) v1(13.34,50.93) v1(13.34,50.93) v1(13.34,50.93) v1(13.34,50.93) v1(13.34,50.93) v1(13.34,50.93) v1(13.34,50.93) v1(13.34,50.93) v1(13.34,50.93) v1(13.34,50.93) v1(13.34,50.93) v1(13.34,50.93) v1(13.34,50.93) v1(13.34,50.93) v1(13.34,50.93) v1(13.34,50.93) v1(13.34,50.93) v1(13.34,50.93) v1(13.34,50.93) v1(13.34,50.93) v1(13.34,50.93) v1(13.34,50.93) v1(13.34,50.93) v1(13.34,50.93) v1(13.34,50.93) v1(13.34,50.93) v1(13.34,50.93) v1(13.34,50.93) v1(13.34,50.93) v1(13.34,50.93) v1(13.34,50.93) v1(13.34,50.93) v1(13.34,50.93) v1(13.34,50.93) v1(13.34,50.93) v1(13.34,50.93) v1(13.34,50.93) v1(13.34,50.93) v1(13.34,50.93) v1(13.34,50.93) v1(13.34,50.93) v1(13.34,50.93) v1(13.34,50.93) v1(13.36,56.41) v1(13.46,63.25) v1(13.54,0.97) v1(13.54,0.97) v1(14.22,27.43) v1(14.86,34.04) v1(15.63,64.03) v1(15.63,64.03) v1(15.75,39.88) v1(16.31,58.7) v1(16.89,47.24) v1(16.89,43.69) v1(17.35,58.7) v1(17.4,27.43) v1(17.91,18.29) v1(17.91,16) v1(17.91,13.72) v1(17.91,6.73) v1(17.91,4.32) v1(17.91,1.02) v1(18.54,24) v1(19.44,64.03) v1(19.44,64.03) v1(19.43,39.62) v1(19.43,36.32) v1(19.43,34.04) v1(19.43,27.43) v1(19.68,48.01) v1(19.68,45.72) v1(20.19,16.64) v1(20.19,5.08) v1(20.32,13.72) v1(20.95,41.15) v1(20.95,37.72) v1(20.95,34.92) v1(20.95,27.43) v1(20.95,24.13) v1(21.18,56.52) v1(21.72,16.64) v1(21.72,5.08) v1(21.92,0.97) v1(21.92,0.97) v1(22.86,48.01) v1(22.86,45.72) v1(23.25,64.03) v1(23.25,64.03) v1(24.38,16.89) v1(24.38,13.72) v1(25.02,36.45) v1(25.27,29.34) v1(25.27,27.43) v1(25.27,24.13) v1(25.73,0.97) v1(25.73,0.97) v1(25.91,39.62) v1(25.91,5.71) v1(27.06,64.03) v1(27.06,64.03) v1(28.19,19.05) v1(28.45,43.43) v1(29.34,36.32) v1(29.46,30.73) v1(29.46,29.08) v1(29.46,26.92) v1(29.54,0.97) v1(29.54,0.97) v1(30.1,62.87) v1(30.1,61.47) v1(30.1,60.2) v1(30.48,38.99) v1(30.48,15.75) v1(30.87,64.03) v1(30.87,64.03) v1(30.86,48.01) v1(30.86,45.72) v1(31.11,62.87) v1(31.11,61.47) v1(31.11,60.2) v1(32.38,37.97) v1(32.64,27.05) v1(33.4,16.64) v1(33.35,0.97) v1(33.35,0.97) v1(33.6,36.4) v1(33.6,35.43) v1(33.6,34.47) v1(33.6,33.5) v1(33.6,32.54) v1(33.6,31.57) v1(33.6,30.61) v1(33.6,29.64) v1(33.6,28.68) v1(34.04,45.21) v1(34.16,48.01) v1(34.42,20.45) v1(34.54,41.15) v1(34.57,36.4) v1(34.57,35.43) v1(34.57,34.47) v1(34.57,33.5) v1(34.57,32.54) v1(34.57,31.57) v1(34.57,30.61) v1(34.57,29.64) v1(34.57,28.68) v1(34.68,64.03) v1(34.68,64.03) v1(35.18,11.05) v1(35.53,36.4) v1(35.53,35.43) v1(35.53,34.47) v1(35.53,33.5) v1(35.53,32.54) v1(35.53,31.57) v1(35.53,30.61) v1(35.53,29.64) v1(35.53,28.68) v1(36.2,40.26) v1(36.5,36.4) v1(36.5,35.43) v1(36.5,34.47) v1(36.5,33.5) v1(36.5,32.54) v1(36.5,31.57) v1(36.5,30.61) v1(36.5,29.64) v1(36.5,28.68) v1(36.58,43.56) v1(37.16,0.97) v1(37.16,0.97) v1(37.47,36.4) v1(37.47,35.43) v1(37.47,34.47) v1(37.47,31.57) v1(37.47,30.61) v1(37.47,29.64) v1(37.47,28.68) v1(37.72,45.21) v1(37.72,23.5) v1(38.43,36.4) v1(38.43,35.43) v1(38.43,34.47) v1(38.43,33.5) v1(38.43,32.54) v1(38.43,31.57) v1(38.43,30.61) v1(38.43,29.64) v1(38.43,28.68) v1(38.49,64.03) v1(38.49,64.03) v1(38.61,23.5) v1(38.61,11.05) v1(39.4,36.4) v1(39.4,35.43) v1(39.4,34.47) v1(39.4,33.5) v1(39.4,32.54) v1(39.4,31.57) v1(39.4,30.61) v1(39.4,29.64) v1(39.4,28.68) v1(39.37,19.68) v1(40.36,36.4) v1(40.36,35.43) v1(40.36,34.47) v1(40.36,33.5) v1(40.36,32.54) v1(40.36,31.57) v1(40.36,30.61) v1(40.36,29.64) v1(40.36,28.68) v1(41.02,40.26) v1(41.02,0.97) v1(41.02,0.97) v1(41.33,35.43) v1(41.33,34.47) v1(41.33,33.5) v1(41.33,32.54) v1(41.33,31.57) v1(41.33,30.61) v1(41.33,29.64) v1(41.33,28.68) v1(41.53,48.9) v1(41.78,23.5) v1(42.21,27.05) v1(42.3,64.03) v1(42.3,64.03) v1(42.67,37.59) v1(42.8,40.26) v1(43.05,43.69) v1(43.87,37.19) v1(44.07,25.27) v1(44.25,28.93) v1(44.55,27.46) v1(44.81,23.9) v1(44.78,0.97) v1(44.78,0.97) v1(44.96,42.67) v1(45.11,35.03) v1(45.44,37.64) v1(45.85,46.48) v1(45.97,22.35) v1(46.11,64.03) v1(46.11,64.03) v1(46.2,27.33) v1(46.99,49.91) v1(46.96,32.23) v1(47.19,23.83) v1(47.5,43.94) v1(47.75,41.02) v1(47.88,32.23) v1(48.44,37.77) v1(48.51,39.12) v1(48.59,0.97) v1(48.59,0.97) v1(48.9,32.23) v1(48.95,29.01) v1(48.9,27.18) v1(48.9,25.27) v1(48.92,23.88) v1(49.28,35.05) v1(49.4,15.62) v1(49.78,12.06) v1(49.92,64.03) v1(49.92,64.03) v1(50.04,43.43) v1(50.42,52.96) v1(50.67,40.64) v1(51.31,35.81) v1(51.94,59.05) v1(52.4,0.97) v1(52.4,0.97) v1(52.7,34.29) v1(53.21,37.85) v1(53.26,32.31) v1(53.34,28.7) v1(53.73,64.03) v1(53.73,64.03) v1(53.72,25.27) v1(54.1,43.94) v1(54.48,23.62) v1(54.74,50.04) v1(55.37,36.45) v1(55.37,33.78) v1(55.37,31.11) v1(55.37,28.7) v1(56.13,52.96) v1(56.21,0.97) v1(56.21,0.97) v1(56.39,23.62) v1(57.54,64.03) v1(57.54,64.03) v1(57.66,46.35) v1(57.91,43.94) v1(57.91,39.37) v1(57.91,36.7) v1(57.91,34.16) v1(57.91,31.62) v1(57.91,28.7) v1(58.8,25.27) v1(60.02,0.97) v1(60.02,0.97) v1(60.07,54.1) v1(60.45,44.96) v1(60.58,50.04) v1(61.09,25.27) v1(61.35,64.03) v1(61.35,64.03) v1(62.23,39.88) v1(62.23,36.7) v1(62.23,34.04) v1(62.23,31.62) v1(62.23,28.7) v1(62.87,23.5) v1(62.87,19.43) v1(62.99,17.91) v1(62.99,15.62) v1(63.83,0.97) v1(63.83,0.97) v1(64.14,9.91) v1(64.39,53.85) v1(64.77,44.45) v1(64.77,39.88) v1(64.77,37.08) v1(64.77,32.51) v1(64.77,28.7) v1(65.16,64.03) v1(65.16,64.03) v1(66.55,17.91) v1(66.55,15.62) v1(67.56,28.83) v1(67.64,0.97) v1(67.64,0.97) v1(68.2,59.82) v1(68.2,56.77) v1(68.2,53.85) v1(68.45,14.1) v1(68.71,44.45) v1(68.71,19.81) v1(68.8,39.24) v1(68.83,17.91) v1(68.83,15.62) v1(68.97,64.03) v1(68.97,64.03) v1(71.45,0.97) v1(71.45,0.97) v1(71.75,59.82) v1(71.75,56.77) v1(71.75,53.85) v1(72.01,19.81) v1(72.01,17.91) v1(72.01,15.62) v1(72.26,44.32) v1(72.78,64.03) v1(72.78,64.03) v1(73.03,6.22) v1(73.15,10.54) v1(73.91,13.97) v1(74.68,19.81) v1(74.68,17.91) v1(74.68,15.62) v1(75.26,0.97) v1(75.26,0.97) v1(75.95,32.64) v1(76.59,64.03) v1(76.59,64.03) v1(77.85,19.81) v1(77.85,17.91) v1(77.85,15.62) v1(77.85,13.84) v1(77.85,11.56) v1(78.87,49.91) v1(79.07,0.97) v1(79.07,0.97) v1(80.4,64.03) v1(80.4,64.03) v1(81.03,19.81) v1(81.03,17.91) v1(81.03,15.62) v1(81.03,13.84) v1(81.03,11.56) v1(82.88,0.97) v1(82.88,0.97) v1(83.31,55.12) v1(83.31,44.83) v1(84.03,62.89) v1(84.03,62.89) v1(84.03,59.08) v1(84.03,48.79) v1(84.03,40.07) v1(84.03,40.07) v1(84.03,36.26) v1(84.03,36.26) v1(84.03,32.45) v1(84.03,32.45) v1(84.03,28.64) v1(84.03,28.64) v1(84.03,24.83) v1(84.03,24.83) v1(84.03,21.02) v1(84.03,21.02) v1(84.03,17.02) v1(84.03,17.02) v1(84.03,12.22) v1(84.03,12.22) v1(84.03,8.41) v1(84.03,8.41) v1(84.03,4.6) v1(84.03,4.6)
VCC11: length 2.9
  TOP w0.203: U1.46 43.09,28.71 v1(43.23,28.57) ; v1(38.81,26.75) 38.87,26.8 U1.37
  BOTTOM w0.381: v1(43.23,28.57) 43.17,28.57 C22.2 ; C21.2 38.81,27.01 v1(38.81,26.75)
VCC11_GPLL: length 5.5
  TOP w0.203: U1.61 43.22,34.71 v1(43.22,34.71)
  BOTTOM w0.508: C17.2 43.13,34.71 v1(43.22,34.71) 43.76,34.71 44.71,35.66 C16.1 FB3.2
VCC11_RX: length 2.9
  TOP w0.203: U1.12 32.17,32.31 v1(31.71,32.31) ; U1.6 32.17,34.71 v1(31.69,34.71)
  BOTTOM w0.381: C13.2 31.73,34.67 v1(31.69,34.71) ; C14.2 31.81,32.31 v1(31.71,32.31)
VCC11_TX: length 7.3
  TOP w0.203: v1(43.25,30.71) 42.76,30.71 U1.51 ; v1(43.23,33.51) 42.76,33.51 U1.58
  BOTTOM w0.381: C19.2 43.02,30.71 v1(43.25,30.71)
  BOTTOM w0.508: FB4.2 C18.1 44.32,33.27 44.09,33.51 v1(43.23,33.51) 43.19,33.51 C38.2
VCC33_RX: length 1.4
  TOP w0.203: U1.16 31.96,30.71 v1(31.75,30.51)
  BOTTOM w0.381: C57.2 31.9,30.35 v1(31.75,30.51)
VCC33_TX: length 6.3
  TOP w0.203: v1(43.23,31.93) 43.22,31.91 U1.54
  BOTTOM w0.508: FB10.2 45.21,29.2 45.21,30.24 C58.1 43.52,31.93 v1(43.23,31.93) 43.1,31.93 C23.2
VCCIO33: length 67
  TOP w0.203: U1.68 41.27,38.09 v1(41.91,38.73) ; U1.42 40.87,26.77 v1(40.84,26.75) ; v1(31.72,28.19) 31.72,28.45 31.99,28.71 U1.21 ; R33.1 29.6,39.12 30.74,37.97 v1(31.5,37.97)
  TOP w0.508: v1(47.88,21.46) 47.12,21.46 R30.1 ; v1(37.34,12.19) R22.1 ; v1(61.59,45.47) R14.1 ; v1(47.88,12.19) R50.1 ; R42.1 50.88,50.03 51.78,50.93 56.64,50.93 ; R44.1 56.64,50.93 ; 56.64,50.93 v1(62.48,50.93) R46.1 ; C42.1 22.88,9.76 23.88,8.76 R49.2 C54.2 ; v1(40.89,12.19) R23.1 ; v1(44.45,12.19) R12.1 ; v1(34.04,12.19) R21.1
  TOP w0.635: C54.2 R40.2
  BOTTOM w0.203: 40.87,26.75 v1(40.84,26.75)
  BOTTOM w0.381: C61.2 40.64,26.98 40.87,26.75 ; C59.2 41.91,38.35 v1(41.91,38.73) ; C60.2 31.98,27.94 v1(31.72,28.19)
  BOTTOM w0.508: 62.48,51.05 v1(62.48,50.93) ; v1(47.88,12.19) 52.08,7.99 R35.1 R34.1
  BOTTOM w0.762: D1.1 8.09,23.91 8.76,23.24 12.45,23.24 v1(15.11,25.91) ; FB9.2 62.48,51.05
  vias: v1(32,13.08) v1(32,13.08) v1(32,12.19) v1(32,12.19) v1(32.89,13.08) v1(32.89,12.19) v1(32.89,12.19) v1(47.5,28.45) v1(47.5,28.45) v1(47.5,27.81) v1(48.13,27.81) v1(48.13,27.81) v1(60.33,21.21) v1(60.33,21.21) v1(61.09,21.21)
VDD11: length 7.2
  TOP w0.203: U1.36 38.46,27.1 38.13,26.67 v1(37.72,26.67) ; U1.20 31.95,29.11 v1(31.72,29.34) ; U1.48 43.23,29.51 v1(43.23,29.49) ; U1.81 36.06,38.1 v1(36.27,38.3) 36.47,38.11 U1.80
  TOP w0.381: v1(36.27,38.3) v1(36.27,38.99)
  BOTTOM w0.381: C27.2 31.85,29.21 v1(31.72,29.34) ; C24.2 43.08,29.34 v1(43.23,29.49) ; C28.2 v1(37.72,26.67)
  vias: v1(37.54,26.04) v1(38.1,26.04)
ARCN: length 41
  TOP w0.127: J8.1 4.09,50.91 10.41,50.91 16.39,44.93 32.26,44.93 35.64,41.55 35.64,37.87 35.66,37.85 U1.82
ARCP: length 40.4
  TOP w0.127: U1.83 35.27,37.87 35.29,37.89 35.29,41.4 32.11,44.58 16.24,44.58 10.27,50.55 4.09,50.55 J8.2
AUDIO_L_O: length 15.8
  TOP w0.203: J2.2 76.5,46.9 74.55,48.85 74.55,51.15 76.5,53.1 J2.1 76.5,53.92 74.68,55.75 C53.2 70.48,55.75 R47.2
AUDIO_R_O: length 18.7
  TOP w0.203: R36.2 70.48,57.92 C45.2 76.08,57.92 80.1,53.9 J2.4
BB_CC1: length 2
  TOP w0.203: J4.A5 18.27,58.57 18.26,58.57 v1(18.26,58.52)
  BOTTOM w0.203: v1(18.26,58.52) 18.26,59.28 18.41,59.44 R55.1
BB_CC2: length 1.9
  TOP w0.203: v1(15.27,58.52) 15.27,58.52 J4.B5
  BOTTOM w0.203: R7.1 15.27,59.44 v1(15.27,58.52)
BB_DM: length 70
  TOP w0.127: U1.26 34.47,26.87 34.44,26.85 34.44,22.2 27.37,15.13 25.16,15.13 v1(25.02,14.99)
  TOP w0.203: v1(16.76,56.64) 16.77,56.64 J4.A7 ; v1(17.75,56.64) 17.75,56.59 17.77,56.59 J4.B7
  BOTTOM w0.127: v1(17.75,56.64) v1(16.76,56.64) 16.74,56.67 16.71,56.67 16.59,56.79 16.59,57.31 16.84,57.56 18.29,57.56 20.75,55.1 20.75,45.08 19.96,44.3 19.96,20.45 22.94,17.48 22.94,15.97 23.78,15.13 24.88,15.13 v1(25.02,14.99)
BB_DP: length 70.7
  TOP w0.127: U1.25 34.06,26.87 34.09,26.85 34.09,22.35 27.22,15.48 25.16,15.48 v1(25.02,15.62)
  TOP w0.203: J4.A6 17.27,56.41 17.04,56.18 16.51,56.18 v1(16.05,56.64) 16.27,56.86 J4.B6
  BOTTOM w0.127: v1(25.02,15.62) 24.88,15.48 23.92,15.48 23.29,16.11 23.29,17.63 20.32,20.6 20.32,44.15 21.11,44.94 21.11,55.24 18.44,57.91 16.69,57.91 16.23,57.45 16.23,56.82 v1(16.05,56.64)
CSCL: length 115.5
  TOP w0.152: U1.78 37.27,43.89 34.54,46.61 v1(18.8,46.61)
  BOTTOM w0.203: R35.2 J3.2 48.64,8.76 11.81,8.76 8.89,11.68 8.89,16.38 18.8,26.29 v1(18.8,46.61)
CSDA: length 122.5
  TOP w0.152: U1.77 37.66,44.38 34.67,47.37 v1(18.03,47.37)
  BOTTOM w0.203: v1(18.03,47.37) 18.03,26.54 8.13,16.64 8.13,11.05 11.18,8 46.86,8 J3.1 50.8,4 50.74,4 52.2,2.54 54.1,2.54 54.61,3.05 R34.2
D1_CC1: length 2.6
  TOP w0.203: U1.23 33.27,25.65 R16.1
D1_CC2: length 3.9
  TOP w0.203: R15.1 33.66,24.91 U1.24
DDC_SCL: length 28.3
  TOP w0.203: U1.87 33.66,38.6 31.5,40.77 22.61,40.77 17.4,35.56 v1(16.76,35.56) 14.15,35.56 13.59,35 CN1.15
  BOTTOM w0.203: v1(16.76,35.56) R3.2
DDC_SDA: length 29.2
  TOP w0.203: CN1.16 13.34,35.5 14.16,36.32 v1(15.62,36.32) 17.27,36.32 22.35,41.4 31.62,41.4 34.06,38.96 U1.86
  BOTTOM w0.203: C41.2 v1(15.62,36.32) R4.2
DP_AUX+: length 33.5
  TOP w0.127: C10.2 60.44,42.41 R17.1 62,42.81 75.42,42.81 76.78,41.45 76.78,32.02 75.44,30.68 72.33,30.68 72.01,31 CN2.15 70.49,31.01
DP_AUX-: length 34.7
  TOP w0.127: 70.49,30.01 CN2.17 72.01,30 72.33,30.32 75.59,30.32 77.14,31.88 77.14,41.59 75.56,43.17 62,43.17 R14.2 60.44,43.57 C11.2
DP_D0+: length 18.4
  TOP w0.127: U1.60 42.77,34.31 42.8,34.29 49.84,34.29 arc(51.06,34.53) 52.1,35.23 53.59,36.72 arc(55.25,37.83) 57.2,38.21 58.8,38.21 arc(59.03,38.26) 59.23,38.39 C2.1
DP_D0-: length 18.4
  TOP w0.127: U1.59 42.8,33.91 42.82,33.93 49.84,33.93 arc(51.2,34.2) 52.35,34.97 53.84,36.47 arc(55.38,37.5) 57.2,37.86 58.73,37.86 arc(59.03,37.8) 59.28,37.63 C3.1
DP_D1+: length 17.9
  TOP w0.127: C4.1 59.26,35.89 arc(59.03,35.73) 58.75,35.67 56.89,35.67 arc(55.41,35.38) 54.15,34.54 53.59,33.98 arc(52.87,33.49) 52.02,33.32 43.99,33.32 arc(43.79,33.28) 43.62,33.17 43.62,33.17 arc(43.53,33.11) 43.43,33.09 42.82,33.09 42.8,33.11 U1.57
DP_D1-: length 17.9
  TOP w0.127: U1.56 42.8,32.71 42.82,32.73 43.44,32.73 arc(43.67,32.78) 43.86,32.91 43.87,32.92 arc(43.93,32.96) 43.99,32.97 52.02,32.97 arc(53,33.17) 53.84,33.72 54.41,34.29 arc(55.55,35.05) 56.89,35.32 58.73,35.32 arc(59.03,35.26) 59.28,35.09 C5.1
DP_D2+: length 17.6
  TOP w0.127: C6.1 59.29,33.37 arc(59.02,33.2) 58.71,33.13 56.82,33.13 arc(55.81,32.93) 54.95,32.36 54.8,32.21 arc(54,31.68) 53.06,31.49 42.82,31.49 42.8,31.51 U1.53
DP_D2-: length 17.6
  TOP w0.127: C7.1 59.32,32.51 arc(59.02,32.71) 58.67,32.78 56.82,32.78 arc(55.95,32.61) 55.21,32.11 55.05,31.96 arc(54.14,31.35) 53.06,31.13 42.82,31.13 42.8,31.11 U1.52
DP_D3+: length 17.2
  TOP w0.127: C8.1 59.3,30.84 arc(59.02,30.66) 58.7,30.59 56.53,30.59 arc(56.31,30.55) 56.12,30.43 56.06,30.36 arc(55.98,30.31) 55.88,30.29 42.82,30.29 42.8,30.31 U1.50
DP_D3-: length 17.2
  TOP w0.127: U1.49 42.8,29.91 42.82,29.93 55.88,29.93 arc(56.11,29.98) 56.31,30.11 56.38,30.18 arc(56.45,30.22) 56.53,30.24 58.71,30.24 arc(59.02,30.18) 59.29,30 C9.1
DP_PWR: length 5.5
  TOP w0.3: CN2.20 68.95,28.5 66.18,25.73 66.18,25.65
GPIO3: length 4.1
  TOP w0.203: U1.88 33.27,38.23 31.61,39.88 R33.2
GPIO16: length 15.1
  TOP w0.152: R32.1 35.18,26.04 36.06,26.92 U1.30
  TOP w0.203: R21.2 R32.1
GPIO17: length 16.4
  TOP w0.152: R22.2 36.58,13.96 35.56,14.99 35.56,25.89 36.47,26.8 U1.31
  TOP w0.203: R28.1 R22.2
GPIO18: length 19.3
  TOP w0.152: U1.32 36.87,26.67 35.94,25.75 35.94,15.49 36.83,14.61 40.25,14.61 R23.2
  TOP w0.203: R29.1 R23.2
GPIO19: length 22.2
  TOP w0.152: R12.2 43.43,14.99 37.21,14.99 36.32,15.88 36.32,25.6 37.27,26.54 U1.33
  TOP w0.203: R19.1 R12.2
GPIO23: length 17.4
  TOP w0.152: U1.62 42.93,35.11 42.99,35.18 43.56,35.18 43.94,35.56 49.02,35.56 54.48,41.02 P1.1
HDMI_5V_DET: length 22.4
  TOP w0.203: R9.2 R11.1 17.91,40.39 19.55,42.04 31.62,42.04 34.47,39.19 U1.85
HS_TSTN: length 6.2
  TOP w0.127: U1.3 32.47,35.9 31.5,35.9 31.25,36.14 30.48,36.14 28.51,38.11 28.08,38.11 P3.1
HS_TSTP: length 6.3
  TOP w0.127: U1.1 32.47,36.75 31.5,36.75 31.25,36.5 30.63,36.5 28.66,38.47 28.08,38.47 P2.1
I2C_ADR: length 33.7
  TOP w0.152: v1(55.63,24.51) 42.93,24.51 41.66,25.78 U1.44
  TOP w0.203: R50.2 R51.1 49.15,13.97 v1(49.91,13.97)
  BOTTOM w0.203: v1(55.63,24.51) 55.63,15.37 54.23,13.97 v1(49.91,13.97)
MCLK_B/GPIO30: length 31.1
  TOP w0.152: U5.4 50.41,56.01 38.46,44.07 U1.75
REXT: length 1.5
  TOP w0.203: v1(31.7,36.32) 31.71,36.31 U1.2
  BOTTOM w0.381: R2.1 31.76,36.32 v1(31.7,36.32)
RST_N: length 51.2
  TOP w0.152: C37.1 41.35,25.08 41.35,26.84 41.27,26.92 U1.43
  TOP w0.203: J6.5 72.64,4.06 73.87,5.29 K1.2 K1.1 66.17,9.15 54.86,20.45 R30.2 C37.1
RX_5V: length 8.2
  TOP w0.203: 14.87,38.11 v1(14.86,38.1) ; 15.62,38.1 R8.1
  TOP w0.25: 13.26,36.5 CN1.18
  TOP w0.508: 15.62,38.1 v1(14.86,38.1) 13.26,36.5 ; R8.1 R9.1
  BOTTOM w0.508: v1(14.86,38.1) 15.62,38.1 R4.1 R3.1
RX_CEC: length 37.9
  TOP w0.203: CN1.13 12.92,34 v1(13.34,34.42) 13.97,34.42 14.22,34.67 19.18,34.67 23.11,38.61 v1(25.27,38.61) ; v1(34.92,44.32) 36.87,42.38 U1.79
  BOTTOM w0.203: v1(25.27,38.61) 25.27,41.4 28.19,44.32 v1(34.92,44.32)
  BOTTOM w0.508: v1(13.34,34.42) R1.2
RX_HPD: length 42.5
  TOP w0.203: CN1.19 8.72,37 7.81,37.91 Q1.1 7.81,43.44 ; U1.84 34.87,39.43 31.62,42.67 13.34,42.67 11.56,44.45 8.76,44.45 7.81,43.5 7.81,43.44 ; R31.2 7.81,43.44
SCLK_B/GPIO31: length 32.2
  TOP w0.152: U5.2 50.5,57.02 38.06,44.58 U1.76
SD0_B/GPIO28: length 32.5
  TOP w0.152: v1(53.98,54.74) 50.7,54.74 39.27,43.31 U1.73
  TOP w0.203: v1(53.98,57.78) 54.25,57.51 U5.1
  BOTTOM w0.203: v1(53.98,57.78) v1(53.98,54.74)
SD1_B/GPIO27: length 19.1
  TOP w0.152: U1.72 39.66,42.93 45.77,49.03 R41.1
  TOP w0.203: R41.1 R42.2
SD2_B/GPIO26: length 24.3
  TOP w0.152: U1.71 40.06,42.55 45.53,48.01 54.48,48.01 R43.1
  TOP w0.203: R43.1 R44.2
SD3_B/GPIO25: length 29.5
  TOP w0.152: R45.1 59.56,47.24 45.54,47.24 40.46,42.16 U1.70
  TOP w0.203: R45.1 R46.2
SPI_CK: length 36.3
  TOP w0.152: J6.2 63.5,10.16 55.24,18.41 45.34,18.41 40.39,23.37 40.39,27.1 40.46,27.18 U1.41
SPI_CSN: length 39
  TOP w0.152: U1.39 39.66,22.31 44.83,17.14 53.98,17.14 59.69,11.43 v1(59.69,9.78)
  BOTTOM w0.203: v1(59.69,9.78) 62.87,9.78 J6.4
SPI_MISO: length 40.1
  TOP w0.152: U1.38 39.27,21.82 44.58,16.51 53.59,16.51 58.42,11.68 58.42,6.86 61.21,4.06 J6.1
SPI_MOSI: length 41.3
  TOP w0.152: J6.3 64.77,5.33 62.1,5.33 60.96,6.48 60.96,11.3 54.48,17.78 45.09,17.78 40.06,22.8 U1.40
TMDS_CLK+: length 21.9
  TOP w0.127: CN1.10 12.68,32.5 arc(12.82,32.53) 12.93,32.61 13.04,32.71 arc(13.16,32.79) 13.31,32.82 19.3,32.82 arc(20.59,33.08) 21.69,33.81 21.79,33.91 arc(23.14,34.82) 24.74,35.13 32.13,35.13 32.15,35.11 U1.5
TMDS_CLK-: length 21.9
  TOP w0.127: U1.4 32.15,35.51 32.13,35.49 24.74,35.49 arc(23.01,35.15) 21.54,34.17 21.44,34.07 arc(20.46,33.41) 19.3,33.18 13.36,33.18 arc(13.17,33.22) 13,33.33 12.95,33.38 arc(12.81,33.47) 12.65,33.5 CN1.12
TMDS_D0+: length 22
  TOP w0.127: U1.8 32.15,33.91 32.13,33.93 25.76,33.93 arc(24.09,33.6) 22.66,32.65 22.66,32.65 arc(21.19,31.67) 19.46,31.32 13.32,31.32 arc(13.16,31.29) 13.03,31.2 12.93,31.1 arc(12.82,31.03) 12.69,31 CN1.7
TMDS_D0-: length 22
  TOP w0.127: CN1.9 12.69,32 arc(12.82,31.97) 12.92,31.9 13.03,31.79 arc(13.16,31.71) 13.31,31.68 19.45,31.68 arc(21.06,32) 22.42,32.91 22.42,32.91 arc(23.95,33.93) 25.76,34.29 32.13,34.29 32.15,34.31 U1.7
TMDS_D1+: length 22.1
  TOP w0.127: U1.11 32.15,32.71 32.13,32.73 26.93,32.73 arc(25.06,32.36) 23.47,31.3 23.33,31.16 arc(21.85,30.17) 20.1,29.82 13.29,29.82 arc(13.16,29.8) 13.05,29.72 12.93,29.61 arc(12.82,29.53) 12.68,29.5 CN1.4
TMDS_D1-: length 22.1
  TOP w0.127: U1.10 32.15,33.11 32.13,33.09 26.91,33.09 arc(24.92,32.69) 23.23,31.57 23.08,31.41 arc(21.71,30.5) 20.1,30.18 13.29,30.18 arc(13.16,30.2) 13.05,30.28 12.91,30.42 arc(12.82,30.48) 12.71,30.5 CN1.6
TMDS_D2+: length 22.2
  TOP w0.127: CN1.1 12.65,28 arc(12.81,28.03) 12.95,28.12 13.02,28.19 arc(13.16,28.29) 13.33,28.32 20.26,28.32 arc(22.55,28.78) 24.48,30.07 24.64,30.22 arc(26.09,31.19) 27.8,31.53 32.13,31.53 32.15,31.51 U1.14
TMDS_D2-: length 22.2
  TOP w0.127: U1.13 32.15,31.91 32.13,31.89 27.8,31.89 arc(25.95,31.52) 24.39,30.48 24.23,30.32 arc(22.41,29.1) 20.26,28.68 13.37,28.68 arc(13.17,28.72) 12.99,28.83 12.93,28.9 arc(12.82,28.97) 12.68,29 CN1.3
TX_AUXN: length 20.2
  TOP w0.127: U1.64 42.8,35.91 42.82,35.89 43.29,35.89 43.69,36.3 48.64,36.3 55.51,43.17 59.05,43.17 C11.1
TX_AUXP: length 20.2
  TOP w0.127: U1.63 42.8,35.51 42.82,35.53 43.43,35.53 43.84,35.94 48.79,35.94 55.66,42.81 59.05,42.81 C10.1
TX_HPD: length 49.5
  TOP w0.152: U1.65 43.18,36.31 43.46,36.59 48.21,36.59 56.7,45.09 v1(58.67,45.09)
  TOP w0.203: CN2.18 67.09,29.5 65.02,27.43 v1(61.21,27.43) R10.1
  BOTTOM w0.203: v1(61.21,27.43) 61.21,42.55 v1(58.67,45.09)
UART_TX: length 57.4
  TOP w0.203: v1(57.4,26.04) 45.04,26.04 42.76,28.31 U1.45
  BOTTOM w0.203: v1(57.4,26.04) 57.4,2.67 56.39,1.65 43.05,1.65 J5.1
VCAP: length 2.7
  TOP w0.203: v1(41.02,38.73) 40.87,38.58 U1.69
  BOTTOM w0.381: v1(41.02,38.73) 40.63,38.73 C1.1
VTERM: length 7.1
  TOP w0.203: v1(44.09,32.41) 42.97,32.41 42.88,32.31 U1.55
  BOTTOM w0.508: FB7.2 C40.1 46.09,31.7 45.38,32.41 v1(44.09,32.41) 43.74,32.77 C39.2
WS_B/GPIO29: length 31.4
  TOP w0.152: U1.74 38.87,43.69 50.55,55.37 v1(52.96,55.37)
  TOP w0.203: U5.3 v1(52.96,56.52)
  BOTTOM w0.203: v1(52.96,56.52) v1(52.96,55.37)
XTAL_IN: length 5.7
  TOP w0.203: C31.1 44.25,40.64 44.25,40 R5.1 42.47,38.23 42.08,38.23 41.66,37.81 U1.67
XTAL_OUT: length 7.8
  TOP w0.203: U1.66 42.76,36.71 43.31,37.25 43.31,37.65 R5.2 45.54,39.88 46.85,39.88 47.85,38.88 C20.1
N3817633: length 1.7
  TOP w0.508: R18.1 LED2.A
N10745133: length 4.6
  TOP w0.254: U5.9 61.97,57.02 v1(61.72,56.77)
  BOTTOM w0.635: FB9.1 62.48,55.63 C43.1 C44.1 v1(61.72,56.77)
N10745259: length 2.9
  TOP w0.254: C51.1 58.05,55.52 U5.5
  TOP w0.635: C50.1 58.05,52.7 C51.1
N10745279: length 1.7
  TOP w0.254: U5.6 63.08,53.9 C52.1
N10745359: length 2.3
  TOP w0.203: U5.10 65.01,57.51 C46.1
N10745363: length 2.2
  TOP w0.203: U5.7 65.01,56.01 C47.1
N10745399: length 2.7
  TOP w0.203: R48.1 68.2,55.75 ; 68.2,55.75 R47.1 ; 68.2,55.75 C47.2
N10745459: length 2.7
  TOP w0.203: C46.2 66.81,57.92 R39.1 68.2,57.91 R36.1
N12122880: length 10.5
  TOP w0.127: C3.2 60.72,37.74 arc(60.85,37.83) 61.01,37.86 66.41,37.86 arc(66.66,37.81) 66.86,37.67 66.91,37.63 arc(67.24,37.4) 67.64,37.32 68.5,37.32 arc(68.63,37.3) 68.73,37.23 68.83,37.13 arc(68.97,37.03) 69.14,37 CN2.3
N12122956: length 10.4
  TOP w0.127: CN2.1 69.15,38 arc(68.98,37.97) 68.83,37.87 68.72,37.76 arc(68.63,37.7) 68.53,37.68 67.65,37.68 arc(67.38,37.73) 67.15,37.88 67.11,37.93 arc(66.79,38.14) 66.42,38.21 61.06,38.21 arc(60.85,38.26) 60.68,38.37 C2.2
N12122960: length 10.5
  TOP w0.127: CN2.6 69.12,35.5 arc(68.97,35.53) 68.85,35.61 68.75,35.71 arc(68.63,35.79) 68.48,35.82 64.24,35.82 arc(64.02,35.78) 63.84,35.66 63.73,35.55 arc(63.48,35.38) 63.17,35.32 61.02,35.32 arc(60.85,35.28) 60.71,35.19 C5.2
N12122976: length 10.5
  TOP w0.127: C4.2 60.72,35.8 arc(60.85,35.71) 61.01,35.67 63.17,35.67 arc(63.34,35.71) 63.48,35.8 63.59,35.91 arc(63.88,36.11) 64.23,36.18 68.51,36.18 arc(68.63,36.2) 68.73,36.27 68.84,36.38 arc(68.97,36.47) 69.13,36.5 CN2.4
N12122980: length 10.7
  TOP w0.127: C6.2 60.66,33.31 arc(60.86,33.18) 61.09,33.13 62.62,33.13 arc(63.53,33.32) 64.31,33.83 64.47,33.99 arc(65.22,34.5) 66.12,34.68 68.49,34.68 arc(68.63,34.71) 68.75,34.78 68.82,34.86 arc(68.98,34.96) 69.16,35 CN2.7
N12122984: length 10.7
  TOP w0.127: CN2.9 69.12,34 arc(68.97,34.03) 68.85,34.11 68.76,34.2 arc(68.63,34.29) 68.47,34.32 66.12,34.32 arc(65.36,34.17) 64.72,33.74 64.55,33.58 arc(63.67,32.99) 62.62,32.78 61.09,32.78 arc(60.86,32.73) 60.66,32.6 C7.2
N12122994: length 11.1
  TOP w0.127: CN2.12 69.15,32.5 arc(68.98,32.53) 68.83,32.63 68.75,32.71 arc(68.63,32.79) 68.48,32.82 67.95,32.82 arc(67.28,32.69) 66.71,32.31 66.12,31.71 arc(64.48,30.62) 62.56,30.24 61.09,30.24 arc(60.86,30.19) 60.66,30.06 C9.2
N12123010: length 11.1
  TOP w0.127: CN2.10 69.1,33.5 arc(68.97,33.47) 68.86,33.4 68.77,33.31 arc(68.62,33.21) 68.45,33.18 67.95,33.18 arc(67.15,33.02) 66.46,32.56 65.87,31.97 arc(64.35,30.95) 62.56,30.59 61.06,30.59 arc(60.85,30.64) 60.68,30.75 C8.2
N12349730: length 1.8
  TOP w0.508: LED1.A 3.56,43.62 3.83,43.62 5.08,43.52 R6.1
N12716242: length 3.9
  TOP w0.203: v1(73.15,32.64) 72.51,32 CN2.13
  BOTTOM w0.203: R20.1 v1(73.15,32.64)
N12716249: length 3.7
  TOP w0.203: v1(73.15,31.5) CN2.14
  BOTTOM w0.203: R27.1 74.18,31.5 v1(73.15,31.5)
N12842552: length 1.4
  BOTTOM w0.508: R1.1 D1.2
N13408424: length 6.2
  BOTTOM w0.508: v1(12.57,3.17) 18.79,3.17 R37.1
N13408556: length 3
  TOP w0.381: U3.1 18.86,5.71 v1(19.56,5.71)
  BOTTOM w0.635: v1(19.56,5.71) 18.8,5.71 ; 18.8,5.71 R37.2 ; 18.8,5.71 C48.1
N13408806: length 3.9
  TOP w0.381: U3.5 20.41,3.15 R38.2
  TOP w0.635: R38.2 R40.1 C54.1
N13416535: length 3
  TOP w0.381: U2.1 18.86,17.27 v1(19.56,17.27)
  BOTTOM w0.635: 18.8,17.27 R24.2 ; 18.8,17.27 C34.1 ; 18.8,17.27 v1(19.56,17.27)
N13416805: length 3.9
  TOP w0.381: U2.5 20.41,14.7 R26.2
  TOP w0.635: R26.2 R25.1 C32.1
N13450472: length 2.1
  TOP w0.203: R13.2 60.07,24.08 60.44,24.44 U4.4
N13450480: length 1.8
  TOP w0.203: 63.75,24.44 63.74,24.44 63.24,24.95 R53.2 ; 63.75,24.44 63.75,24.38 ; 63.75,24.44 U4.3
N121165261: length 5.3
  TOP w0.508: Q1.3 8.76,45.59 LED1.C

## Copper pours and planes (outline as drawn; the poured copper is in the pictures)
1V1 on BOTTOM (solid shape): outline of 576 points within 28.45,19.56 52.96,37.08
5V_IN2 on TOP (solid shape): 19.42,57.05 19.54,56.95 19.58,56.84 19.65,56.75 19.68,56.71 19.68,56.66 19.68,51.87 20.75,50.8 28.57,50.8 28.66,50.76 28.7,50.67 28.7,49.15 28.66,49.06 28.57,49.02 16.74,49.02 16.69,49.03 16.65,49.06 14.39,51.32 14.36,51.36 14.35,51.41 14.35,56.66 14.36,56.71 14.39,56.75 14.46,56.84 14.49,56.95 14.62,57.05 14.74,56.95 14.77,56.85 14.83,56.77 14.85,56.73 14.86,56.69 14.86,56.34 15.62,55.58 18.16,55.58 19.18,56.59 19.18,56.69 19.18,56.73 19.21,56.77 19.26,56.85 19.29,56.95
5V_SYS on TOP (solid shape): 17.02,15.24 17.11,15.2 17.14,15.11 17.14,13.84 17.11,13.75 17.02,13.72 12.9,13.72 11.43,12.24 11.43,4.95 11.39,4.86 11.3,4.83 9.91,4.83 9.82,4.86 9.78,4.95 9.78,13.48 9.79,13.53 9.82,13.57 11.45,15.2 11.49,15.23 11.54,15.24
